# Altium PCB USB-3.0-A-TH_HC-ST-003-01-Z.pcbdoc
Units mm, origin at the board's own origin, x right, y up, seen from the top; angles counter-clockwise.
Board outline 28.8 x 29.56 mm, 2 copper layers (Top Layer, Bottom Layer); 1 components, 0 nets, 11 pads, 0 vias.
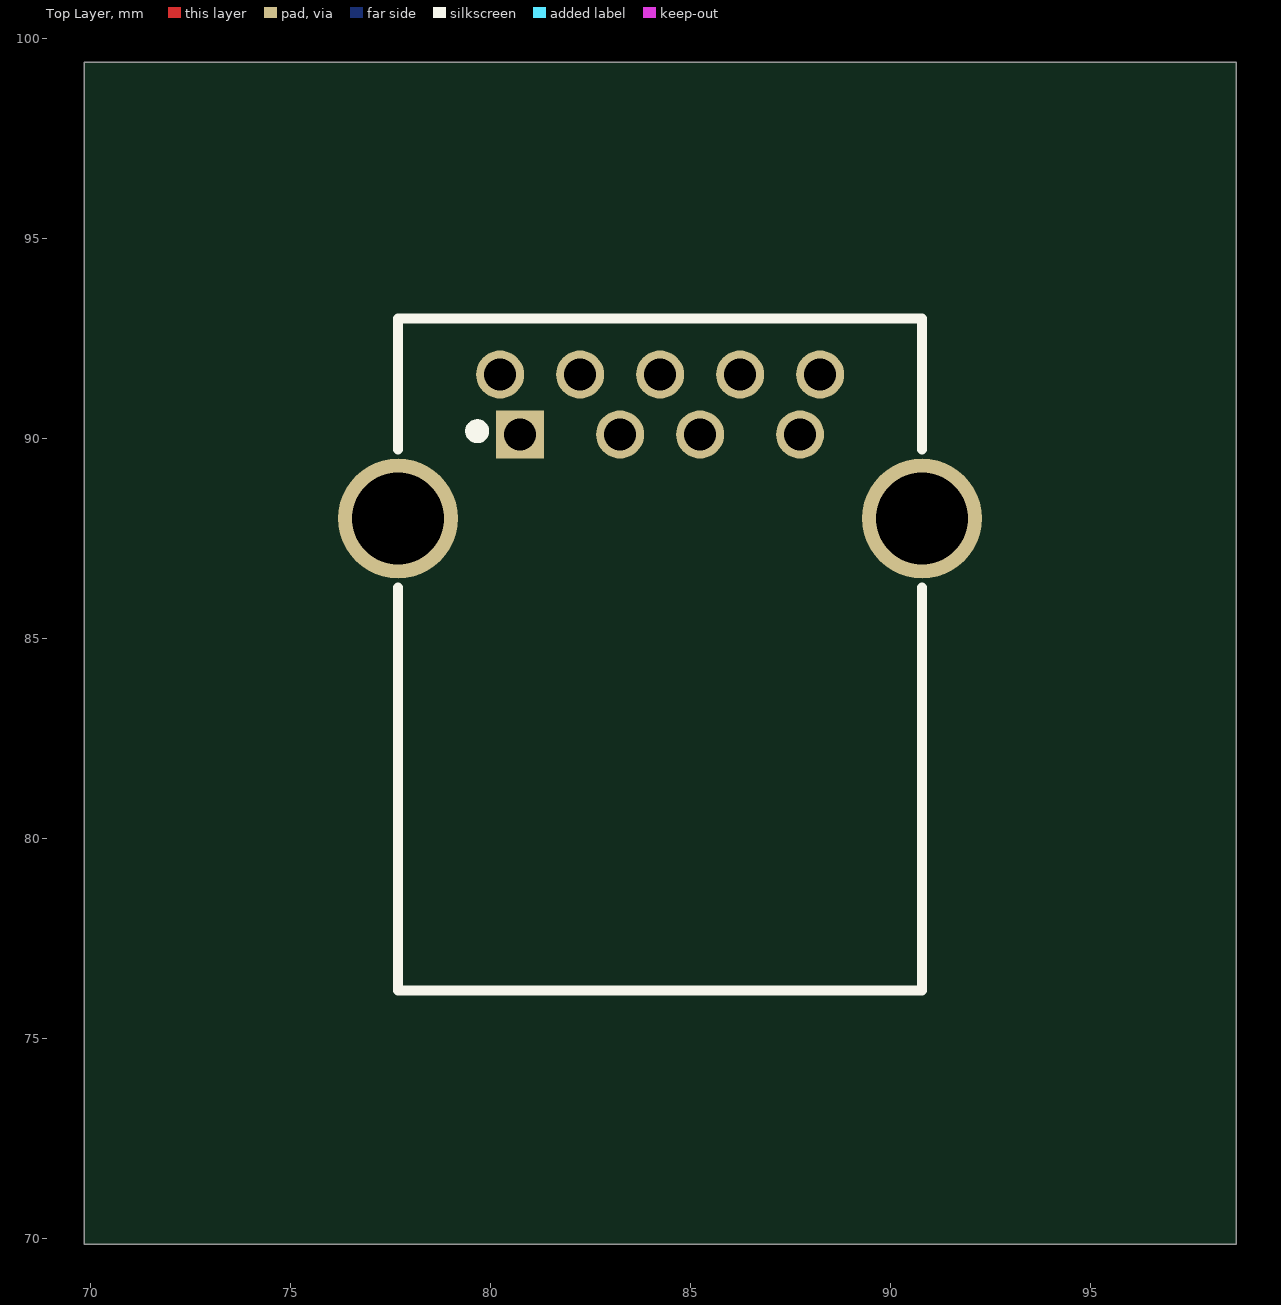
[diagram p0: Top Layer view]
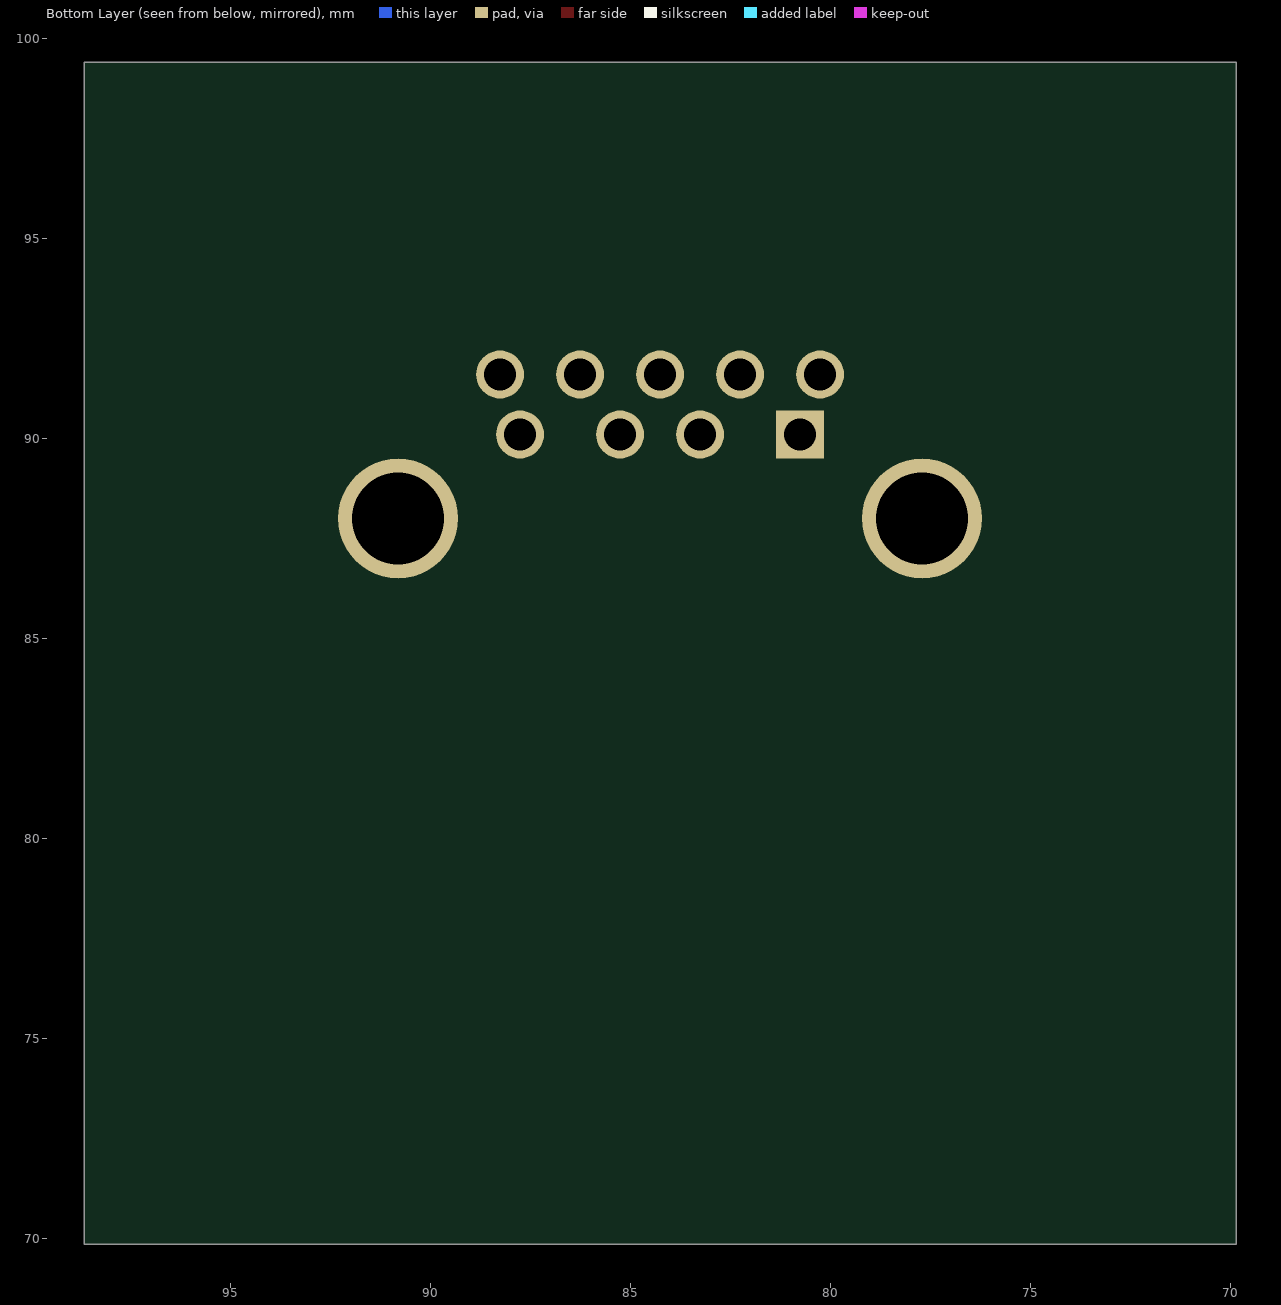
[diagram p1: Bottom Layer view, seen from below]

## Layer stack, top to bottom
Top Layer: signal copper (thickness not stored)
Dielectric: dielectric 0.32, FR-4, Dk 4.8
Bottom Layer: signal copper (thickness not stored)

## Board outline
98.65,69.85 69.85,69.85 69.85,99.41 98.65,99.41

## Components (designator, comment, footprint, x,y, rotation, side; value= is the part's Value field where it differs from the comment)
? "USB-3.0-A-TH_HC-ST-003-01-Z" USB-3.0-A-TH_HC-ST-003-01-Z 84.25,89.8 r0 top

## Footprints (in the part's own frame and the unit in brackets; to place one, negate y for a bottom-side part, rotate by r counter-clockwise, add the part's x,y. Pads: shape width x height; smd on the part's side, far side on the other; paste and mask are expansions set on the pad)
USB-3.0-A-TH_HC-ST-003-01-Z [mm]
  rect 1.2x1.2 hole 0.8: 1(-3.5,0.3)
  round 1.2 hole 0.8: 2(-1,0.3) 3(1,0.3) 4(3.5,0.3) 5(4,1.8) 6(2,1.8) 7(0,1.8) 8(-2,1.8) 9(-4,1.8)
  round 3 hole 2.3: 10(-6.55,-1.8) 11(6.55,-1.8)
  silkscreen extent -6.55,-13.6 6.55,3.2

## Nets (pads, with @x,y where several pads share a name; then routed paths per layer and width w, separated by ;. In a path a pad name is that pad's centre, name@x,y a point inside that pad or via, vN(x,y) a via of type N, cw(c..) or ccw(c..) an arc to the next point about the centre after c; other vN are vias at no path point)
pads on no net: ?.1 ?.2 ?.3 ?.4 ?.5 ?.6 ?.7 ?.8 ?.9 ?.10 ?.11